# Altium PCB PCB_Lampda_2024-07-19.pcbdoc (part 1 of 2)
Units mil, origin at the board's own origin, x right, y up, seen from the top; angles counter-clockwise.
Board outline 2732.28 x 2742.31 mil, 2 copper layers (Top Layer, Bottom Layer); 110 components, 107 nets, 461 pads, 275 vias.
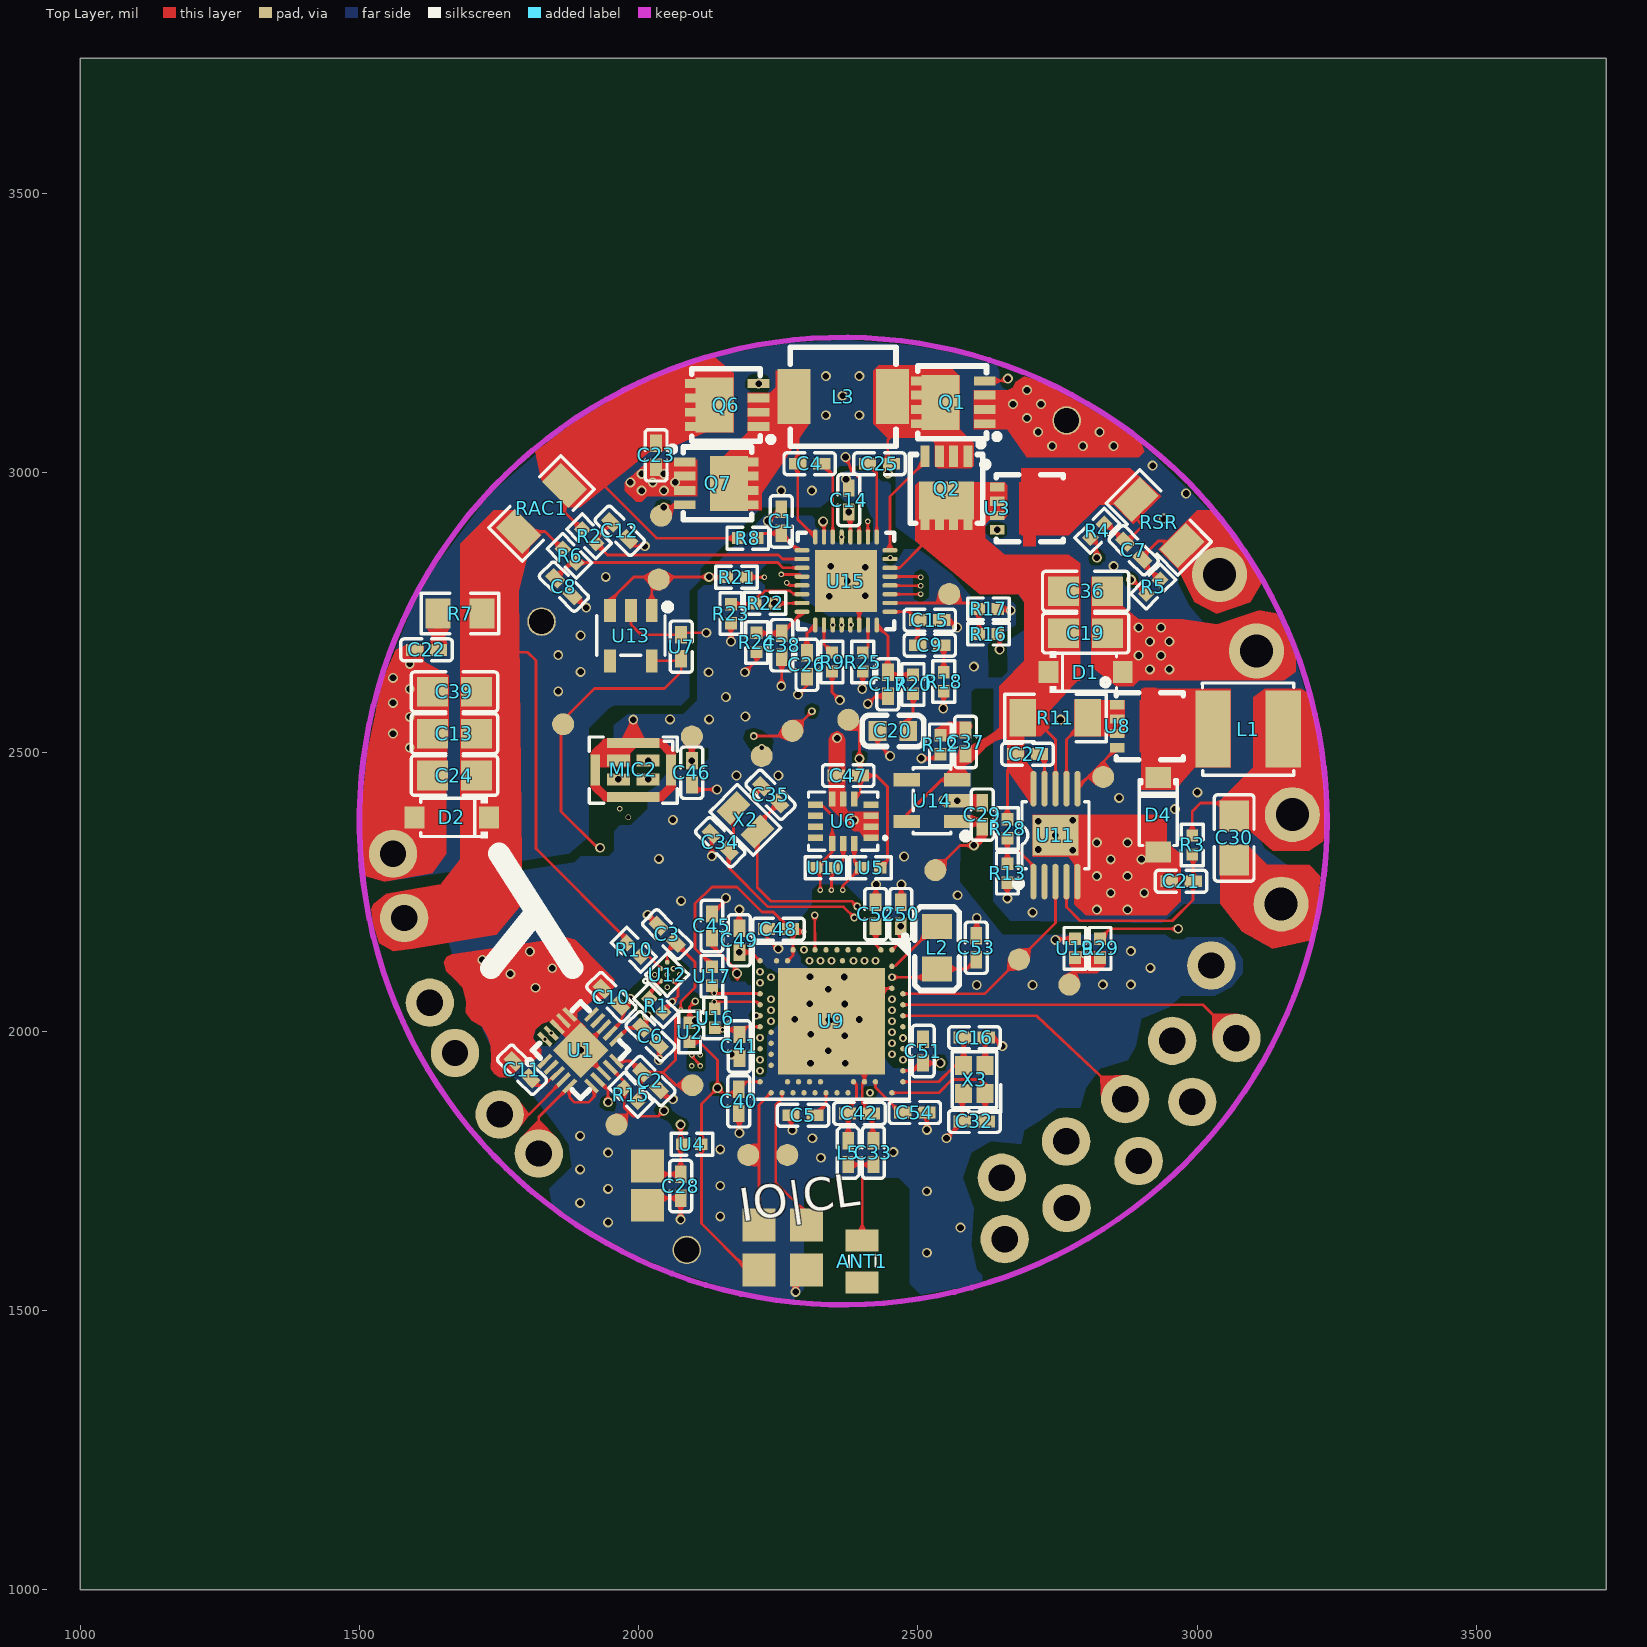
[diagram p0: Top Layer view]
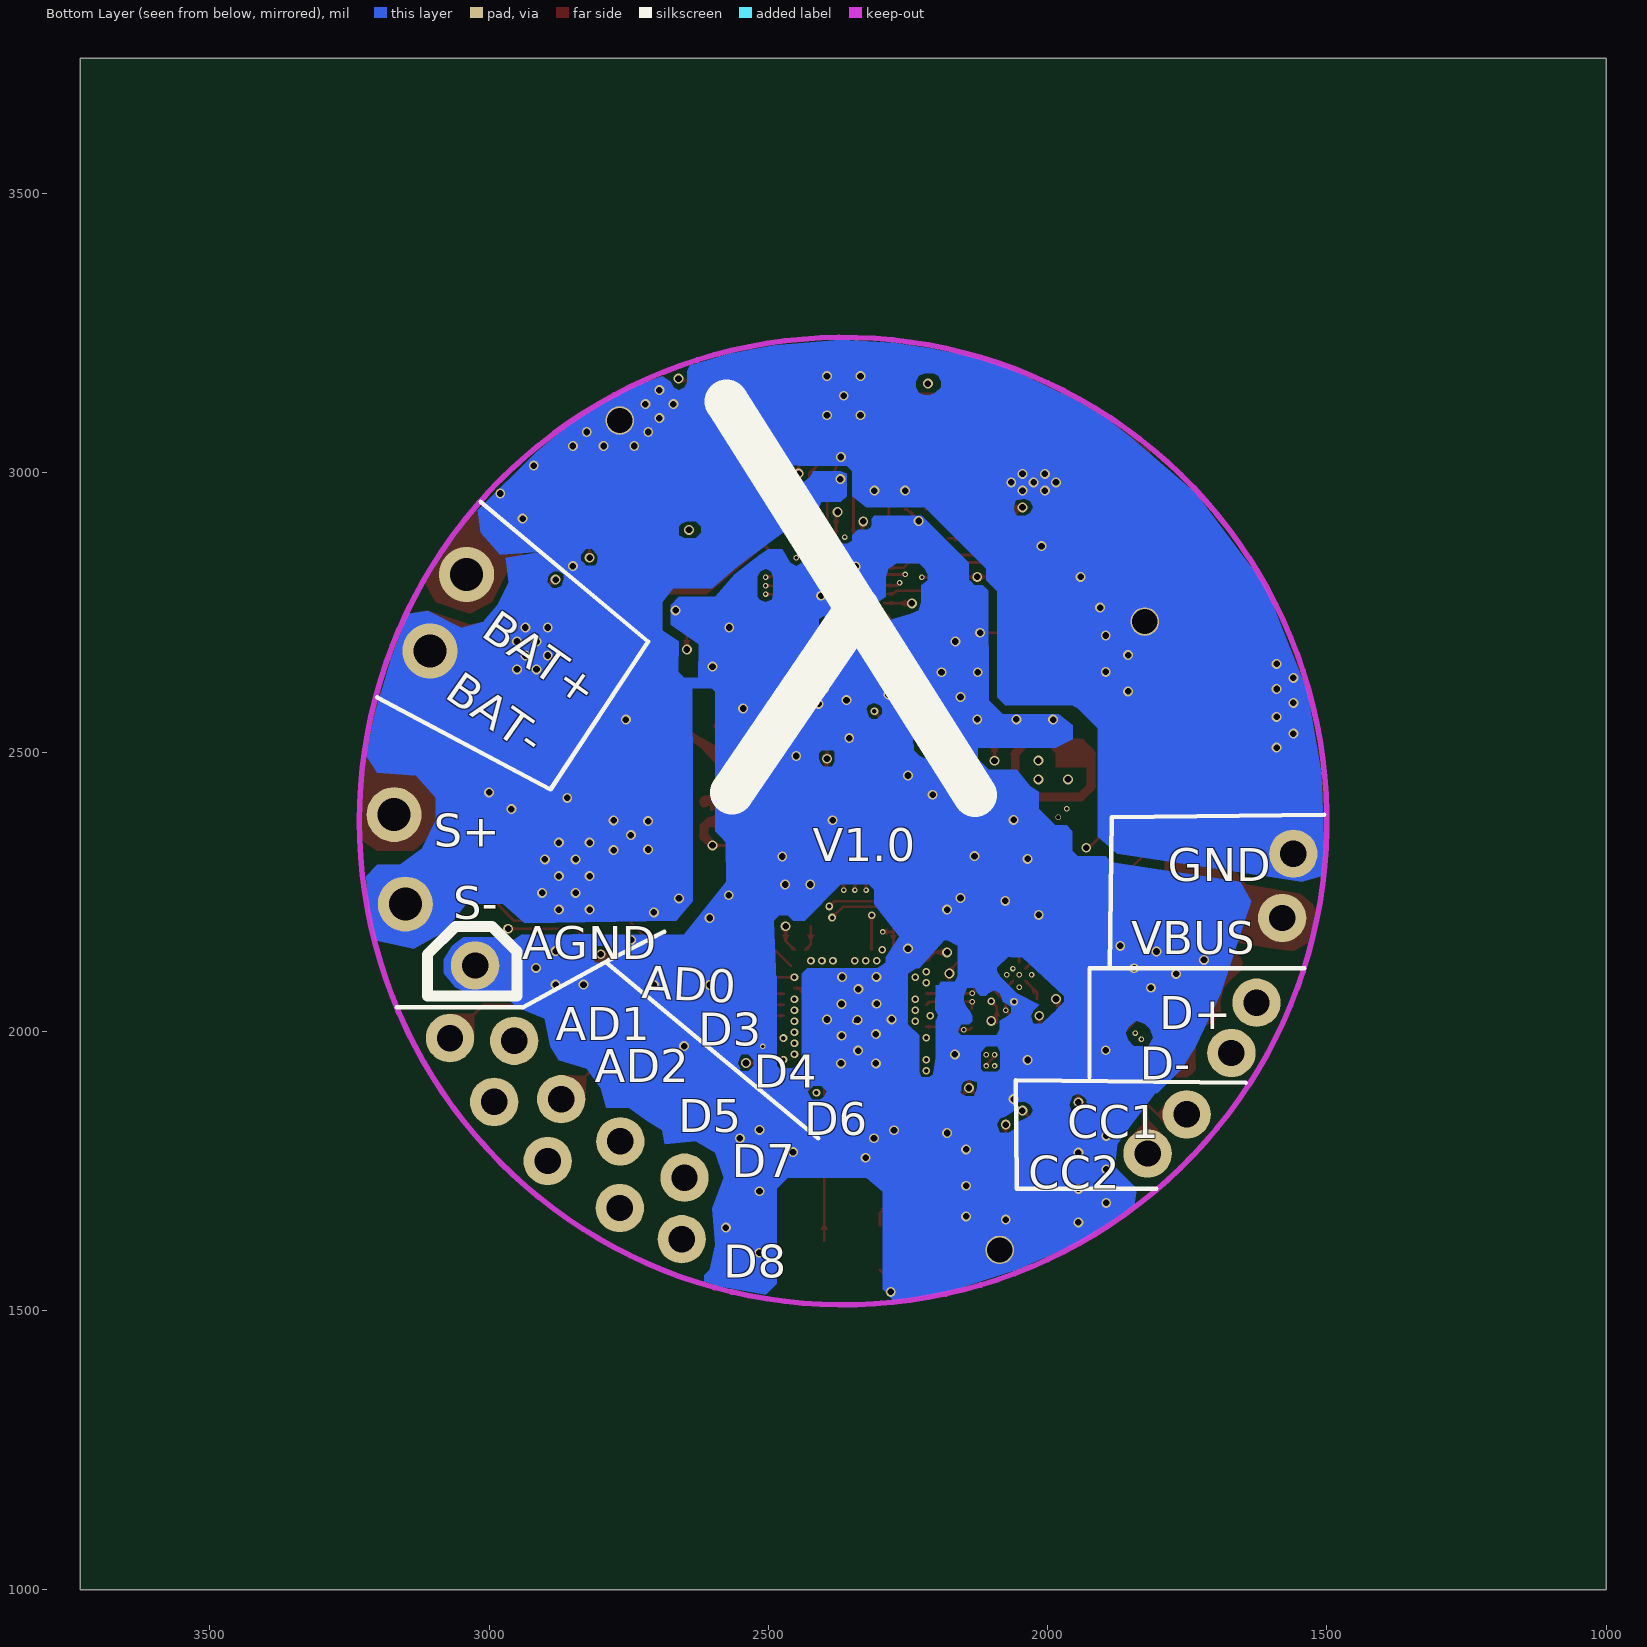
[diagram p1: Bottom Layer view, seen from below]

## Layer stack, top to bottom
Top Layer: signal copper (thickness not stored)
Dielectric: dielectric 12.6, FR-4, Dk 4.8
Bottom Layer: signal copper (thickness not stored)

## Board outline
3732.28,1000 1000,1000 1000,3742.31 3732.28,3742.31

## Components (designator, comment, footprint, x,y, rotation, side; value= is the part's Value field where it differs from the comment)
ANT1 "KH-2012-HM1" ANT-SMD_2P-L2.0-W1.2 2400.19,1587.9 r270 top
C1 "470nF" C0402 2255.19,2912.9 r90 top
C2 "1uF" C0402 2021.14,1911.17 r135 top
C3 "100nF" C0402 2051.07,2173.58 r135 top
C4 "47nF" C0402 2306.14,3016.17 r0 top
C5 "820pF" C0402 2294.24,1849.63 r0 top
C6 "220pF" C0402 2021.14,1991.17 r315 top
C7 "100nF" C0402 2886.14,2861.17 r135 top
C8 "33nF" C0402 1866.14,2796.17 r135 top
C9 "680pF" C0402 2521.14,2691.17 r0 top
C10 "220pF" C0402 1951.14,2061.17 r315 top
C11 "100nF" C0402 1791.14,1931.17 r315 top
C12 "33nF" C0402 1966.14,2896.17 r315 top
C13 "10uF" C0805 1670.19,2532.9 r0 top
C14 "2.2uF" C0402 2376.14,2951.17 r90 top
C15 "15pF" C0402 2521.14,2736.17 r0 top
C16 "12pF" C0402 2601.07,1988.58 r180 top
C17 "33pF" C0402 2446.14,2621.17 r270 top
C19 "10uF" C0805 2800.19,2712.9 r180 top
C20 "1.8uF" C0603 2455.19,2537.9 r180 top
C21 "470pF" C0402 2971.07,2268.58 r180 top
C22 "1uF" C0402 1620.19,2682.9 r0 top
C23 "10nF" C0402 2031.14,3031.17 r270 top
C24 "10uF" C0805 1670.19,2457.9 r0 top
C25 "47nF" C0402 2431.14,3016.17 r180 top
C26 "100pF" C0402 2301.14,2656.17 r270 top
C27 "1uF" C0402 2696.14,2496.17 r180 top
C28 "100nF" C0402 2075.19,1722.9 r270 top
C29 "4.7uF" C0402 2615.19,2387.9 r270 top
C30 "2.2uF" C0805 3066.14,2346.17 r90 top
C32 "12pF" C0402 2601.07,1838.58 r180 top
C33 "0.5pF" C0402 2420.19,1782.9 r90 top
C34 "12pF" C0402 2146.07,2338.58 r315 top
C35 "12pF" C0402 2236.07,2423.58 r315 top
C36 "10uF" C0805 2800.19,2787.9 r180 top
C37 "1uF" C0402 2585.19,2517.9 r270 top
C38 "100pF" C0402 2256.14,2691.17 r270 top
C39 "10uF" C0805 1670.19,2607.9 r0 top
C40 "100nF" C0402 2179.24,1874.63 r270 top
C41 "100nF" C0402 2180.19,1972.9 r90 top
C42 "0.8pF" C0402 2395.19,1852.9 r180 top
C45 "4.7uF" C0402 2131.07,2188.58 r270 top
C46 "100nF" C0402 2095.19,2462.9 r270 top
C47 "100nF" C0402 2375.19,2457.9 r180 top
C48 "4.7uF" C0402 2250.19,2182.9 r180 top
C49 "4.7uF" C0402 2180.19,2162.9 r270 top
C50 "1uF" C0402 2469.24,2209.63 r270 top
C51 "100nF" C0402 2509.24,1964.63 r90 top
C52 "100nF" C0402 2424.24,2209.63 r90 top
C53 "2.2uF" C0402 2604.24,2149.63 r270 top
C54 "100pF" C0402 2494.24,1854.63 r180 top
D1 "PTVS18VS1UR,115" SOD-123_L2.6-W1.7-LS3.5-RD 2800.19,2642.9 r0 top
D2 "PTVS20VS1UR,115" SOD-123_L2.6-W1.7-LS3.5-RD 1665.19,2382.9 r180 top
D4 "DSS34" SOD-123_L2.8-W1.8-LS3.7-RD 2930.19,2387.9 r270 top
L1 "8.2uH" IND-SMD_L4.0-W4.0 3091.14,2541.17 r0 top
L2 "10uH" L0805 2534.24,2149.63 r90 top
L3 "2.2uH" IND-SMD_L4.8-W4.5 2366.14,3136.17 r0 top
L5 "4.7nH" L0402 2375.19,1782.9 r270 top
MIC2 "GMA4030H11-F26" MIC-SMD_8P-L3.0-W4.0-P0.85-BL 1990.19,2467.9 r0 top
Q1 "SIS412DN-T1-GE3" POWERPAK-1212-8_L3.0-W3.0-P0.65-LS3.3-BL 2561.14,3126.17 r90 top
Q2 "SIS412DN-T1-GE3" POWERPAK-1212-8_L3.0-W3.0-P0.65-LS3.3-BL 2551.14,2971.17 r180 top
Q6 "SIS412DN-T1-GE3" POWERPAK-1212-8_L3.0-W3.0-P0.65-LS3.3-BL 2156.14,3121.17 r90 top
Q7 "SIS412DN-T1-GE3" POWERPAK-1212-8_L3.0-W3.0-P0.65-LS3.3-BL 2141.14,2981.17 r270 top
R1 "1kΩ" R0402 2031.14,2046.17 r315 top
R2 "4.99Ω" R0402 1911.14,2886.17 r135 top
R3 "5.1kΩ" R0402 2991.07,2333.58 r270 top
R4 "10Ω" R0402 2821.14,2896.17 r45 top
R5 "10Ω" R0402 2921.14,2796.17 r45 top
R6 "4.99Ω" R0402 1876.14,2851.17 r135 top
R7 "2.2Ω" R0805 1680.19,2747.9 r180 top
R8 "1Ω" R0402 2195.19,2882.9 r0 top
R9 "30kΩ" R0402 2346.14,2661.17 r270 top
R10 "4.7kΩ" R0402 1991.14,2146.17 r315 top
R11 "100mΩ" R1206 2746.14,2561.17 r0 top
R12 "1Ω" R0402 2540.19,2512.9 r90 top
R13 "4.7kΩ" R0402 2660.19,2282.9 r90 top
R15 "100kΩ" R0402 1986.14,1886.17 r315 top
R16 "24kΩ" R0402 2626.14,2711.17 r180 top
R17 "100kΩ" R0402 2626.14,2756.17 r0 top
R18 "10kΩ" R0402 2546.14,2626.17 r270 top
R20 "40.2kΩ" R0402 2491.14,2621.17 r270 top
R21 "10Ω" R0402 2175.19,2812.9 r180 top
R22 "383kΩ" R0402 2226.14,2766.17 r180 top
R23 "221kΩ" R0402 2165.19,2747.9 r270 top
R24 "137kΩ" R0402 2211.14,2696.17 r270 top
R25 "10kΩ" R0402 2401.14,2661.17 r270 top
R28 "40.2kΩ" R0402 2660.19,2362.9 r270 top
R29 "221kΩ" R0402 2826.07,2148.58 r270 top
RAC1 "10mΩ" R1206 1826.14,2936.17 r45 top
RSR "10mΩ" R1206 2931.14,2911.17 r315 top
U1 "TPD8S300" WQFN-20_L3.0-W3.0-P0.40-TL-EP 1896.14,1966.17 r45 top
U2 "10kΩ" R0402 2091.07,1998.58 r270 top
U3 "AGM60P85AP" WDFN-5_L3.3-W3.3-P0.65-BL 2671.14,2936.17 r270 top
U4 "10kΩ" R0402 2095.19,1797.9 r0 top
U5 "10kΩ" R0402 2415.19,2292.9 r180 top
U6 "LSM6DS3TR" LGA-14_L3.0-W2.5-P0.50-TL 2366.14,2376.17 r180 top
U7 "1uF" C0402 2076.07,2688.58 r270 top
U8 "AGM60P85AP" WDFN-5_L3.3-W3.3-P0.65-BL 2886.14,2546.17 r270 top
U9 "NRF52840-QIAA-R" AQFN-73_L7.0-W7.0-P0.50-BL-EP4.8 2345.19,2017.9 r180 top
U10 "10kΩ" R0402 2335.19,2292.9 r180 top
U11 "LM3409HV" MSOP-10_L3.0-W3.0-P0.50-LS5.0-BL-EP 2746.14,2351.17 r0 top
U12 "FUSB302BUCX" WLCSP-9_L1.3-W1.2-R3-C3-P0.40-TL 2051.11,2101.2 r45 top
U13 "AP2204K-5.0TRG1(MS)" SOT-23-5_L3.0-W1.5-P0.95-LS2.8-BL 1986.07,2708.58 r180 top
U14 "ST730M33R" SOT-23-5_L3.0-W1.6-P0.95-LS2.8-BR 2525.19,2412.9 r0 top
U15 "BQ25703ARSNR" VQFN-32_L4.0-W4.0-P0.40-TL-EP 2371.14,2806.17 r0 top
U16 "10kΩ" R0402 2136.07,2023.58 r270 top
U17 "10kΩ" R0402 2131.07,2098.58 r270 top
U19 "47kΩ" R0402 2781.07,2148.58 r270 top
X2 "32.768kHz" CRYSTAL-SMD_L2.0-W1.2 2191.07,2378.58 r315 top
X3 "32MHz" CRYSTAL-SMD_4P-L2.0-W1.6-BL-A 2601.07,1913.58 r90 top

## Footprints (in the part's own frame and the unit in brackets; to place one, negate y for a bottom-side part, rotate by r counter-clockwise, add the part's x,y. Pads: shape width x height; smd on the part's side, far side on the other; paste and mask are expansions set on the pad)
ANT-SMD_2P-L2.0-W1.2 [mm]
  rect 1x1.5 smd paste+0 mask+0.051: 1(-0.95,0) 2(0.95,0)
  silkscreen extent -0.31,-0.6 0.27,0.61
AQFN-73_L7.0-W7.0-P0.50-BL-EP4.8 [mm]
  rect 4.85x4.85 smd paste-100 mask+0.051: 0(0,0)
  round 0.25 smd paste-100 mask+0.051: A8(-3.25,-1.25) A10(-3.25,-0.75) A12(-3.25,-0.25) A14(-3.25,0.25) A16(-3.25,0.75) A18(-3.25,1.25) A20(-3.25,1.75) A22(-3.25,2.25) A23(-3.25,2.75) AA24(2.25,3.25) AB2(2.5,-2.75) AC5(2.75,-2) AC9(2.75,-1) AC11(2.75,-0.5) AC13(2.75,0) AC15(2.75,0.5) AC17(2.75,1) AC19(2.75,1.5) AC21(2.75,2) AC24(2.75,3.25) AD2(3.25,-2.75) AD4(3.25,-2.25) AD6(3.25,-1.75) AD8(3.25,-1.25) AD10(3.25,-0.75) AD12(3.25,-0.25) AD14(3.25,0.25) AD16(3.25,0.75) AD18(3.25,1.25) AD20(3.25,1.75) AD22(3.25,2.25) AD23(3.25,2.75) B1(-2.75,-3.25) B3(-2.75,-2.5) B5(-2.75,-2) B7(-2.75,-1.5) B9(-2.75,-1) B11(-2.75,-0.5) B13(-2.75,0) B15(-2.75,0.5) B17(-2.75,1) B19(-2.75,1.5) B24(-2.75,3.25) C1(-2.25,-3.25) D2(-2,-2.75) D23(-2,2.75) E24(-1.75,3.25) F2(-1.5,-2.75) F23(-1.5,2.75) G1(-1.25,-3.25) H2(-1,-2.75) H23(-1,2.75) J1(-0.75,-3.25) J24(-0.75,3.25) K2(-0.5,-2.75) L1(-0.25,-3.25) L24(-0.25,3.25) M2(0,-2.75) N1(0.25,-3.25) N24(0.25,3.25) P2(0.5,-2.75) P23(0.5,2.75) R1(0.75,-3.25) R24(0.75,3.25) T2(1,-2.75) T23(1,2.75) U1(1.25,-3.25) U24(1.25,3.25) V23(1.5,2.75) W1(1.75,-3.25) W24(1.75,3.25) Y2(2,-2.75) Y23(2,2.75)
  silkscreen extent -3.55,-3.95 3.55,3.55
C0402 [mm]
  rect 0.79x0.54 smd paste-100 mask+0.051: 1(-0.545,0) 2(0.545,0)
  silkscreen extent -1.17,-0.5 1.17,0.5
C0603 [mm]
  rect 0.8x0.9 smd paste+0 mask+0.051: 1(-0.7,0) 2(0.7,0)
  silkscreen extent -1.41,-0.71 1.39,0.72
C0805 [mm]
  rect 1.41x1.35 smd paste-100 mask+0.051: 1(-1,0) 2(1,0)
  silkscreen extent -1.96,-0.9 1.96,0.9
CRYSTAL-SMD_4P-L2.0-W1.6-BL-A [mm]
  rect 0.875x0.775 smd paste+0 mask+0.051: 1(-0.638,-0.488) 2(0.638,-0.488) 3(0.638,0.488) 4(-0.638,0.488)
  silkscreen extent -1.49,-1.2 1.27,1.02
CRYSTAL-SMD_L2.0-W1.2 [mm]
  rect 0.9x1.3 smd paste+0 mask+0.051: 1(-0.762,0) 2(0.762,0)
  silkscreen extent -1.4,-0.89 1.4,0.88
IND-SMD_L4.0-W4.0 [mm]
  rect 1.6x3.5 smd paste+0 mask+0.051: 1(-1.6,0) 2(1.6,0)
  silkscreen extent -2.08,-2.1 2.08,2.1
IND-SMD_L4.8-W4.5 [mm]
  rect 1.5x2.5 smd paste+0 mask+0.051: 1(-2.246,0) 2(2.246,0)
  silkscreen extent -2.4,-2.25 2.4,2.25
L0402 [mm]
  rect 0.79x0.54 smd paste-100 mask+0.051: 1(-0.545,0) 2(0.545,0)
  silkscreen extent -1.17,-0.5 1.17,0.5
L0805 [mil]
  rect 44.59x54.21 smd paste-3937.01 mask+2: 1(-38.05,0) 2(38.04,0)
  silkscreen extent -77,-40 73,40
LGA-14_L3.0-W2.5-P0.50-TL [mm]
  rect 0.675x0.28 smd paste+0 mask+0.051: 1(-1.262,0.75) 2(-1.262,0.25) 3(-1.262,-0.25) 4(-1.262,-0.75) 8(1.262,-0.75) 9(1.262,-0.25) 10(1.262,0.25) 11(1.262,0.75)
  rect 0.28x0.675 smd paste+0 mask+0.051: 5(-0.5,-1.012) 6(0,-1.012) 7(0.5,-1.012) 12(0.5,1.012) 13(0,1.012) 14(-0.5,1.012)
  silkscreen extent -1.98,-1.33 1.58,1.33
MIC-SMD_8P-L3.0-W4.0-P0.85-BL [mm]
  rect 1.05x0.55 smd paste+0 mask+0.051: 1(0.675,0.425) 2(-0.675,0.425) 3(-0.675,-0.425) 4(0.675,-0.425)
  rect 0.45x1.4 smd paste+0 mask+0.051: 5(1.725,0) 7(-1.725,0)
  rect 2.4x0.45 smd paste+0 mask+0.051: 6(0,1.225) 8(0,-1.225)
  silkscreen extent -2,-1.52 2,1.5
MSOP-10_L3.0-W3.0-P0.50-LS5.0-BL-EP [mm]
  oval 0.28x1.62 smd paste-100 mask+0.051: 1(-1,-2.11) 2(-0.5,-2.11) 3(0,-2.11) 4(0.5,-2.11) 5(1,-2.11) 6(1,2.11) 7(0.5,2.11) 8(0,2.11) 9(-0.5,2.11) 10(-1,2.11)
  rect 2.1x1.83 smd paste-100 mask+0.051: 11(0,0)
  silkscreen extent -1.84,-2.35 1.52,1.52
POWERPAK-1212-8_L3.0-W3.0-P0.65-LS3.3-BL [mil]
  rect 15.98x39.02 smd paste-3937.01 mask+1.97: 1(-38.39,-58.5) 2(-12.8,-58.5) 3(12.8,-58.5) 4(38.39,-58.5)
  rect 15.98x30 smd paste-3937.01 mask+1.97: 5(38.39,58.5) 6(12.8,58.5) 7(-12.8,58.5) 8(-38.39,58.5)
  rect 98.42x67.99 smd paste-3937.01 mask+1.97: 8(0,20.5)
  silkscreen extent -66,-85 65,61
R0402 [mm]
  rect 0.566x0.54 smd paste-100 mask+0.051: 1(-0.433,0) 2(0.433,0)
  silkscreen extent -0.94,-0.5 0.94,0.5
R0805 [mil]
  rect 44.59x54.21 smd paste-3937.01 mask+2: 1(-39.37,0) 2(39.37,0)
  silkscreen extent -69,-36 69,36
R1206 [mil]
  rect 47.54x66.97 smd paste-3937.01 mask+2: 1(-58.22,0) 2(58.22,0)
  silkscreen extent -91,-42 91,42
SOD-123_L2.6-W1.7-LS3.5-RD [mm]
  rect 0.9x1 smd paste+0 mask+0.051: 1(-1.693,0) 2(1.693,0)
  silkscreen extent -1.63,-0.94 1.41,0.94
SOD-123_L2.8-W1.8-LS3.7-RD [mm]
  rect 0.95x1.15 smd paste+0 mask+0.051: 1(-1.693,0) 2(1.693,0)
  silkscreen extent -1.58,-0.87 1.41,0.87
SOT-23-5_L3.0-W1.5-P0.95-LS2.8-BL [mm]
  rect 0.532x1.045 smd paste+0 mask+0.051: 1(-0.95,-1.147) 2(0,-1.147) 3(0.95,-1.147) 4(0.95,1.147) 5(-0.95,1.147)
  silkscreen extent -1.82,-1.45 1.55,0.9
SOT-23-5_L3.0-W1.6-P0.95-LS2.8-BR [mm]
  rect 1.2x0.6 smd paste+0 mask+0.05: 1(1.15,-0.95) 2(1.15,0) 3(1.15,0.95) 4(-1.15,0.95) 5(-1.15,-0.95)
  silkscreen extent -0.85,-1.76 1.68,1.5
VQFN-32_L4.0-W4.0-P0.40-TL-EP [mm]
  oval 0.7x0.2 smd paste-100 mask+0.051: 1(-2,1.4) 2(-2,1) 3(-2,0.6) 4(-2,0.2) 5(-2,-0.2) 6(-2,-0.6) 7(-2,-1) 8(-2,-1.4) 17(2,-1.4) 18(2,-1) 19(2,-0.6) 20(2,-0.2) 21(2,0.2) 22(2,0.6) 23(2,1) 24(2,1.4)
  oval 0.2x0.7 smd paste-100 mask+0.051: 9(-1.4,-2) 10(-1,-2) 11(-0.6,-2) 12(-0.2,-2) 13(0.2,-2) 14(0.6,-2) 15(1,-2) 16(1.4,-2) 25(1.4,2) 26(1,2) 27(0.6,2) 28(0.2,2) 29(-0.2,2) 30(-0.6,2) 31(-1,2) 32(-1.4,2)
  rect 2.8x2.8 smd paste-100 mask+0.051: 33(0,0)
  silkscreen extent -2.51,-2.2 2.2,2.2
WDFN-5_L3.3-W3.3-P0.65-BL [mm]
  rect 0.42x0.66 smd paste-100 mask+0.051: 1(-0.975,-0.735) 2(-0.325,-0.735) 3(0.325,-0.735) 4(0.975,-0.735)
  Top Layer region: 1.185,0.45 1.185,0.27 -1.185,0.27 -1.185,0.45 -1.75,0.45 -1.75,1.02 -1.185,1.02 -1.185,2.535 -0.765,2.535 -0.765,2.065 -0.535,2.065 -0.535,2.535 -0.115,2.535 -0.115,2.065 0.115,2.065 0.115,2.535 0.535,2.535 0.535,2.065 0.765,2.065 0.765,2.535 1.185,2.535 1.185,1.02 1.73,1.02 1.73,0.45
  silkscreen extent -2.15,-1.43 1.52,2.26
WLCSP-9_L1.3-W1.2-R3-C3-P0.40-TL [mm]
  round 0.215 smd paste-100 mask+0.051: A1(-0.4,0.4) A2(0,0.4) A3(0.4,0.4) B1(-0.4,0) B2(0,0) B3(0.4,0) C1(-0.4,-0.4) C2(0,-0.4) C3(0.4,-0.4)
  silkscreen extent -1,-0.7 0.7,0.7
WQFN-20_L3.0-W3.0-P0.40-TL-EP [mm]
  rect 0.8x0.2 smd paste+0 mask+0.051: 1(-1.5,0.8) 2(-1.5,0.4) 3(-1.5,0) 4(-1.5,-0.4) 5(-1.5,-0.8) 11(1.5,-0.8) 12(1.5,-0.4) 13(1.5,0) 14(1.5,0.4) 15(1.5,0.8)
  rect 0.2x0.8 smd paste+0 mask+0.051: 6(-0.8,-1.5) 7(-0.4,-1.5) 8(0,-1.5) 9(0.4,-1.5) 10(0.8,-1.5) 16(0.8,1.5) 17(0.4,1.5) 18(0,1.5) 19(-0.4,1.5) 20(-0.8,1.5)
  rect 1.8x1.8 smd paste+0 mask+0.051: 21(0,0)
  silkscreen extent -2.13,-1.55 1.55,1.55

## Free pads (board coordinates)
  round 39.37 smd paste-3937.01 mask+2: 1(1864.76,2549.82) 1(1960.19,1832.9) 1(2035.74,2808.91) 1(2040.19,2922.9) 1(2095.19,2527.9) 1(2096.08,1903.58) 1(2196.07,1778.58) 1(2220.19,2492.9) 1(2266.07,1778.58) 1(2275.19,2537.9) 1(2375.19,2557.9) 1(2531.07,2288.58) 1(2555.96,2782.9) 1(2680.82,2128.53) 1(2771.07,2083.58) 1(2831.67,2455.38)
  rect 59.05x59.05 smd paste-3937.01 mask+2: 1(2016.07,1688.58) 1(2016.07,1758.58) 1(2215.19,1572.9) 1(2215.19,1652.9) 1(2300.19,1572.9) 1(2300.19,1652.9)
  round 51.18 hole 45.35 paste-3937.01 mask+2: 2(1826.08,2733.58) 2(2086.07,1608.58) 2(2766.07,3093.58)
  round 86.61 hole 47.24 paste+0 mask+2: ""(1560.19,2317.9) ""(1580.19,2202.9) ""(1626.14,2051.17) ""(1671.14,1961.17) ""(1751.14,1851.17) ""(1821.14,1781.17) ""(2650.19,1737.9) ""(2655.19,1627.9) ""(2765.19,1802.9) ""(2766.07,1683.58) ""(2871.07,1878.58) ""(2895.19,1767.9) ""(2955.19,1982.9) ""(2991.08,1873.57) ""(3025.19,2117.9) ""(3070.19,1987.9)
  round 98.43 hole 59.06 paste+0 mask+2: ""(3040.19,2817.9) ""(3106.14,2681.17) ""(3150.19,2227.9) ""(3170.19,2387.9)

## Via types
v1: diameter 17.72, hole 11.81, Top Layer to Bottom Layer, tented both sides, 203 vias
v2: diameter 13.78, hole 7.87, Top Layer to Bottom Layer, tented both sides, 35 vias
v3: diameter 9.84, hole 5.91, Top Layer to Bottom Layer, tented both sides, 34 vias
v4: diameter 98.43, hole 59.06, Top Layer to Bottom Layer, tented both sides, 2 vias
v5: diameter 9.84, hole 7.87, Top Layer to Bottom Layer, tented both sides, 1 vias

## Nets (pads, with @x,y where several pads share a name; then routed paths per layer and width w, separated by ;. In a path a pad name is that pad's centre, name@x,y a point inside that pad or via, vN(x,y) a via of type N, cw(c..) or ccw(c..) an arc to the next point about the centre after c; other vN are vias at no path point)
AIN0: pad.@2871.07,1878.58 U9.A12 | length 456.9
  Top Layer w5: U9.A12@2473.14,2027.77 2711.94,2027.77 pad.@2871.04,1878.57
AIN1: pad.@2991.08,1873.57 U9.B13 | length 597.4
  Mid-Layer 1 w5: v2@2453.44,2017.87 2826.78,2017.87 2948.97,1895.69 2968.97,1895.69 pad.@2991.08,1873.57
  other v2: 2453.46,2017.9
AIN4: pad.@2955.19,1982.9 U9.B11 | length 524.4
  Mid-Layer 1 w5: v2(2453.46,2037.58) 2900.51,2037.58 pad.@2955.19,1982.9
AIN5: pad.@3070.19,1987.9 U9.A10 | length 621.7
  Top Layer w5: U9.A10@2473.14,2047.43 3010.66,2047.43 pad.@3070.19,1987.9
ANT: C42.2 L5.1 U9.H23 | length 115
  Top Layer w5: L5.1@2375.19,1804.36 2375.19,1851.44 C42.2@2373.73,1852.9 2373.73,1861.44 2390.19,1877.9 2390.19,1904 U9.H23@2384.56,1909.63
BAT21: pad.1@2771.07,2083.58 R29.2 U9.B9 U19.2 | length 527.5
  Top Layer w5: pad.1@2771.07,2083.58 2781.07,2093.58 U19.2@2781.07,2131.54 ; U19.2@2781.07,2131.54 R29.2@2826.07,2131.54 2806.55,2131.54 v1(2800.19,2137.9) 2793.83,2131.54 U19.2@2781.07,2131.54
  Mid-Layer 1 w5: v2(2453.46,2057.27) 2719.56,2057.27 v1(2800.19,2137.9)
BAT+: C7.1 pad.@3040.19,2817.9 R5.2 R29.1 RSR.2 | length 935.9
  Top Layer w5: R29.1@2826.04,2165.67 2844.04,2183.57 v1(2966.07,2183.58) ; C7.1@2901.31,2846 2901.31,2840.1 R5.2@2933.19,2808.22 ; C7.1@2901.31,2846 2901.34,2848.97 2930.24,2877.87 2940.94,2877.87 RSR.2@2951.64,2867.17
  Mid-Layer 2 w5: v1(2966.07,2183.58) 3035.39,2252.9 3040.19,2252.9 v4(3040.19,2817.9)
C9_2: C9.2 R18.1 | length 49.4
  Top Layer w5: C9.2@2542.6,2691.17 2546.14,2687.63 R18.1@2546.14,2643.21
C22_2: C22.2 R7.2 | length 65
  Top Layer w15.75: R7.2@1640.82,2747.9 C22.2@1641.65,2682.9
CH_ACN: C12.1 R2.1 U15.2 | length 429.8
  Top Layer w5: C12.1@1950.97,2911.35 1923.19,2883.56 R2.1@1923.19,2874.12 1944.41,2852.9 2250.19,2852.9 2257.55,2845.54 U15.2@2292.4,2845.54
CH_ACP: C8.2 R6.1 U15.3 | length 456.8
  Top Layer w5: C8.2@1850.97,2811.35 1878.75,2839.12 R6.1@1888.19,2839.12 2248.97,2839.12 2258.3,2829.79 U15.3@2292.4,2829.79
CH_BATDRV: U3.4 U15.21 | length 228
  Top Layer w5: U15.21@2449.88,2814.05 2504.05,2814.04 v3(2505.19,2812.9)
  Mid-Layer 2 w5: v3(2505.19,2812.9) 2557.31,2812.9 v1(2642.2,2897.79)
CH_BATPREZ: pad.1@2555.96,2782.9 R16.2 R17.1 U15.18 | length 208.6
  Top Layer w5: U15.18@2449.88,2766.8 2598.47,2766.8 R17.1@2609.1,2756.17 R16.2@2609.1,2711.17
CH_BTST1: C4.2 U15.30 | length 139.5
  Top Layer w5: C4.2@2327.6,3016.17 2347.52,2996.25 U15.30@2347.52,2884.91
CH_BTST2: C25.2 U15.25 | length 138.1
  Top Layer w5: C25.2@2409.68,3016.17 2426.26,2999.59 U15.25@2426.26,2884.91
CH_CHARGE_OK: U9.U1 U15.4 | length 760.8
  Top Layer w5: v3(2255.19,2817.9) 2288.54,2817.9 U15.4@2292.4,2814.05
  Mid-Layer 1 w5: v3(2255.19,2817.9) 2215.24,2777.87 2215.24,2557.87 2270.24,2502.87 2270.24,2171.67 v2@2295.94,2145.87
  other v2: 2295.98,2145.85
CH_CMPOUT: R25.1 U15.15 | length 53.1
  Top Layer w5: R25.1@2401.14,2678.21 2410.51,2687.58 U15.15@2410.51,2727.43
CH_COMP1: C17.1 R20.1 U15.16 | length 139.9
  Top Layer w5: U15.16@2426.26,2727.43 2446.14,2707.55 C17.1@2446.14,2642.63 2450.56,2638.21 R20.1@2491.14,2638.21
CH_COMP2: C9.1 C15.1 U15.17 | length 101
  Top Layer w5: U15.17@2449.88,2751.05 2484.8,2751.05 C15.1@2499.68,2736.17 C9.1@2499.68,2691.17
CH_EN_OTG: U9.T2 U15.5 | length 771.4
  Top Layer w5: v3(2265.19,2802.9) 2269.79,2798.3 U15.5@2292.4,2798.3
  Mid-Layer 1 w5: v3(2265.19,2802.9) 2255.34,2802.87 2225.24,2772.77 2225.24,2562.87 2280.24,2507.87 2280.24,2214.37 2310.24,2184.37 v2@2310.24,2130.57 ; v2@2310.24,2130.57 v2(2305.84,2126.17) v2@2310.24,2130.57
CH_HIDRV1: Q6.4 U15.31 | length 323.2
  Top Layer w5: v1(2330.19,2912.9) 2331.77,2911.32 U15.31@2331.77,2884.91
  Mid-Layer 2 w5: v1(2214.64,3159.56) 2330.19,3044.01 v1(2330.19,2912.9)
CH_HIDRV2: Q2.4 U15.24 | length 194.4
  Top Layer w5: U15.24@2449.88,2861.29 2449.88,2957.59 2512.75,3020.46 Q2.4@2512.75,3029.67
CH_IADPT: C38.1 R24.1 U15.8 | length 98.4
  Top Layer w5: R24.1@2211.14,2713.21 2256.14,2712.67 2292.4,2748.89 U15.8@2292.4,2751.05
CH_IBAT: C26.1 U15.9 | length 56
  Top Layer w5: C26.1@2301.14,2677.63 2301.14,2712.55 U15.9@2316.02,2727.43
CH_ILIMHIZ: R22.2 R23.1 U15.6 | length 142.4
  Top Layer w5: R23.1@2165.19,2764.94 2207.87,2764.94 R22.2@2209.1,2766.17 ; R22.2@2209.1,2766.17 2209.14,2771.77 2225.84,2788.57 2271.07,2788.58 2276.07,2783.58 U15.6@2292.4,2782.55
CH_INT_N: U2.1 U9.AD12 U12.B2 | length 224.7
  Top Layer w5: U2.1@2091.07,2015.62 2091.07,2043.58 v2(2101.07,2053.58)
  Mid-Layer 1 w5: v3(2051.14,2101.17) 2098.73,2053.58 v2(2101.07,2053.58)
  Mid-Layer 2 w5: v1(2101.07,2018.58) 2110.39,2027.9 v2(2210.19,2027.9)
CH_LODRV1: pad.1@2040.19,2922.9 Q7.4 U15.29 | length 381.1
  Top Layer w5: pad.1@2044.94,2937.07 Q7.4@2082.64,2943.17
  Mid-Layer 2 w5: v1(2045.19,2937.9) 2045.19,2932.9 2093.18,2884.91 v3(2363.27,2884.91)
CH_LODRV2: Q1.4 U15.26 | length 442.4
  Top Layer w5: v3(2410.19,2912.9) U15.26@2410.51,2884.91 ; Q1.4@2619.64,3164.56 2657.05,3164.56 v1(2661.07,3168.58)
  Mid-Layer 2 w5: v3(2410.19,2912.9) 2410.24,2937.67 2641.04,3168.57 v1@2661.04,3168.57
CH_PROC_HOT: U9.R1 U15.11 | length 668.7
  Top Layer w5: v2(2315.19,2207.9) U9.R1@2315.64,2145.87
  Mid-Layer 1 w5: v2(2315.19,2207.9) 2290.24,2232.87 2290.24,2512.87 2235.19,2567.92 2235.19,2627.9 2334.72,2727.43 v3(2347.52,2727.43)
CH_PSYS: R9.1 U15.10 | length 55.2
  Top Layer w5: U15.10@2331.77,2727.43 2331.77,2692.58 R9.1@2346.14,2678.21
CH_REGN: C14.1 pad.1@2035.74,2808.91 R21.2 U13.1 U13.3 U15.28 | length 665.9
  Top Layer w5: U13.3@1948.67,2753.76 1948.67,2771.18 1991.07,2813.58 2031.07,2813.58 2037.91,2806.74 pad.1@2039.24,2806.74 ; U13.1@2023.48,2753.76 2023.47,2790.98 2046.08,2813.58 v1(2126.07,2813.58) 2126.76,2812.89 2138.35,2812.89 R21.2@2158.14,2812.87 ; v1(2376.14,2929.71) 2379.02,2926.83 U15.28@2379.02,2884.91
  Mid-Layer 1 w5: v1(2126.07,2813.58) 2126.07,2833.78 2222,2929.71 v1(2376.14,2929.71)
CH_SRN: R5.1 U15.19 | length 480.1
  Top Layer w5: U15.19@2449.84,2782.57 v3(2505.19,2782.9) ; v1(2881.07,2808.58) 2884.63,2808.58 R5.1@2909.09,2784.12
  Mid-Layer 2 w5: v3(2505.19,2782.9) 2855.39,2782.9 v1(2881.07,2808.58)
CH_SRP: R4.1 U15.20 | length 431.9
  Top Layer w5: U15.20@2449.84,2798.27 v3(2505.19,2797.9) ; R4.1@2809.09,2884.12 2820.19,2873.02 v1(2820.19,2847.9)
  Mid-Layer 2 w5: v3(2505.19,2797.9) 2770.19,2797.9 v1(2820.19,2847.9)
CH_SW1: C4.1 L3.1 Q6.1 Q6.2 Q6.3 Q7.5 Q7.6 Q7.7 Q7.8 U15.32 | length 205.9
  Top Layer w5: C4.1@2284.64,3016.17 2285.24,3077.87 ; C4.1@2284.68,3016.17 2284.68,2916.25 U15.32@2316.02,2884.91
CH_SW2: C25.1 L3.2 Q1.5 Q1.6 Q1.7 Q1.8 Q2.1 Q2.2 Q2.3 U15.23 | length 230.1
  Top Layer w5: v1(2446.07,2998.58) 2446.07,3058.78 2455.19,3067.9
  Mid-Layer 1 w5: v1@2446.04,2998.57 2441.07,2988.58 2441.07,2853.58 v3(2450.19,2847.9)
CH_VBUS: C1.1 R8.2 U15.1 | length 96.2
  Top Layer w5: R8.2@2212.23,2882.9 2220.77,2891.44 C1.1@2255.19,2891.44 2285.34,2861.29 U15.1@2292.4,2861.29
CH_VDDA: R16.1 R21.1 R22.1 U15.7 | length 602.4
  Top Layer w5: R21.1@2192.23,2812.9 v3(2225.19,2812.9) ; v1(2243.14,2766.17) U15.7@2292.4,2766.8 ; R16.1@2643.18,2711.17 2646.07,2708.28 v1(2646.07,2683.58)
  Mid-Layer 2 w5: v3(2225.19,2812.9) 2243.14,2794.95 v1(2243.14,2766.17) 2254.74,2754.57 2261.44,2747.87 2581.78,2747.87 v1(2646.07,2683.58)
COFF: C21.1 R3.2 U11.4 | length 380
  Top Layer w5: U11.4@2765.82,2268.1 2765.84,2222.27 2790.24,2197.87 2955.24,2197.87 2992.53,2235.16 C21.1@2992.53,2268.58 2992.53,2315.08 R3.2@2991.07,2316.54
CSN: R11.2 U8.1 U8.2 U8.3 U11.7 | length 142.9
  Top Layer w5: U11.7@2765.82,2434.24 2765.83,2522.64 R11.2@2804.36,2561.17
D4_1: D4.1 L1.1
DEC6: C53.2 L2.1 U9.B5 U9.E24 | length 386.8
  Top Layer w5: v2(2453.46,2096.64) 2519.29,2096.64 L2.1@2534.24,2111.59 2587.66,2111.59 C53.2@2604.24,2128.17
  Mid-Layer 1 w5: v2(2414.09,1889.95) 2425.19,1901.05 2425.19,2068.37 v2(2453.46,2096.64)
DECUSB: C45.2 U9.AC5 | length 182.6
  Top Layer w5: C45.2@2131.07,2167.12 2131.07,2153.58 2176.07,2108.58 v1(2176.07,2103.58) 2176.65,2103 2176.65,2092.9
  Mid-Layer 2 w5: v1(2176.07,2103.58) 2200.39,2127.9 2215.19,2127.9 2236.92,2106.17 v2(2236.92,2096.64)
FAULT: pad.1@1960.19,1832.9 R15.1 U1.9 U9.AD20 | length 405.8
  Top Layer w5: U1.9@1949.03,1935.54 1974.09,1910.47 R15.1@1974.09,1898.22 1974.09,1864 1990.19,1847.9 2035.27,1847.9 v1(2045.24,1857.87) ; pad.1@1960.19,1832.9 1981.67,1854.38 1983.71,1854.38
  Mid-Layer 1 w5: v1(2045.24,1857.87) 2125.24,1857.87 v2(2217.24,1949)
GND: C1.2 C2.1 C3.2 C5.1 C6.2 C8.1 C10.1 C11.1 C12.2 C13.1 C14.2 C15.2 C16.1 C17.2 C19.1 C20.2 C21.2 C22.1 C23.2 C24.1 C26.2 C28.2 C29.1 C30.1 C32.2 C33.2 C34.1 C35.1 C36.1 C38.2 C39.1 C40.2 C41.1 C42.1 C45.1 C46.2 C47.2 C48.2 C49.1 C50.1 C51.2 C52.2 C53.1 C54.1 D1.2 D2.2 D4.2 MIC2.2 MIC2.5 MIC2.6 MIC2.7 MIC2.8 pad.1@2016.07,1688.58 pad.1@2300.19,1572.9 pad.2 pad.@1560.19,2317.9 pad.@3025.19,2117.9 pad.@3106.14,2681.17 pad.@3150.19,2227.9 Q1.1 Q1.2 Q1.3 Q7.1 Q7.2 Q7.3 R1.2 R9.2 R12.1 R13.1 R17.2 R18.2 R23.2 R24.2 R25.2 U1.8 U1.13 U1.16 U1.17 U1.18 U1.21 U6.1 U6.2 U6.3 U6.6 U6.7 U7.1 U9.0 U9.B7 U9.F23 U11.5 U11.11 U12.C2 U13.2 U14.2 U15.14 U15.27 U15.33 U19.1 X3.2 X3.4 | length 3294.9
  Top Layer w5: 1750.24,1972.87 C11.1@1775.94,1946.37 ; C8.1@1881.31,2781 1883.65,2781 v1(1906.07,2758.58) ; U1.8@1937.89,1924.41 v1(1896.13,1966.17) U1.13@1937.89,2007.93 ; C12.2@1981.31,2881 1993.73,2868.58 v1(2011.07,2868.58) ; U13.2@1986.07,2753.76 1986.07,2728.58 2004.62,2710.04 U7.1@2076.07,2710.04 2079.61,2713.58 v1(2121.07,2713.58) ; pad.1@2016.07,1688.58 2028.93,1701.44 C28.2@2075.19,1701.44 v1(2075.19,1662.9) ; v1(2016.07,2208.58) C3.2@2035.9,2188.75 ; v1(2036.07,1948.58) 2036.31,1948.82 C6.2@2036.31,1976 ; C2.1@2036.31,1896 2053.73,1878.58 v1(2061.07,1878.58) ; R1.2@2043.19,2034.12 2043.19,2035.9 v2(2060.19,2052.9) ; v2(2060.19,2052.9) 2070.19,2062.9 2070.19,2082.12 U12.C2@2062.25,2090.06 ; C46.2@2095.19,2441.44 2103.73,2432.9 v1(2140.19,2432.9) ; C34.1@2130.9,2353.75 2131.07,2353.58 v1(2131.07,2313.58) ; C45.1@2131.07,2210.04 2156.07,2235.04 v1(2156.07,2238.58) ; v1(2165.19,2697.9) R23.2@2165.19,2730.86 ; v1(2166.07,1958.58) 2173.13,1958.58 C41.1@2180.24,1951.47 ; C40.2@2179.24,1853.17 v1@2180.24,1822.87 ; C49.1@2180.19,2184.36 v1(2180.19,2217.9) ; v1(2190.19,2642.9) 2211.14,2663.85 R24.2@2211.14,2679.13 ; v1(2206.07,2423.58) 2200.98,2418.49 2200.64,2418.49 C35.1@2220.9,2438.75 ; C48.2@2228.73,2182.9 2228.73,2169.36 v1(2250.19,2147.9) ; v1(2231.07,2913.58) 2251.85,2934.36 C1.2@2255.19,2934.36 ; v1(2255.19,2617.9) 2256.14,2618.85 C38.2@2256.14,2669.71 ; v1@2270.19,1822.9 2272.78,1825.49 C5.1@2272.78,1849.63 ; v1(2281.07,1533.58) 2281.07,1553.7 pad.1@2300.19,1572.9 ; v1(2285.19,2602.9) 2301.14,2618.85 C26.2@2301.14,2634.71 ; R9.2@2346.14,2644.13 2346.14,2606.95 v1(2360.19,2592.9) ; v1@2370.24,3032.87 2381.07,3003.58 2396.07,2988.58 2394.74,2964.87 U15.27@2394.74,2884.87 ; v1(2371.07,2988.58) 2376.14,2983.51 C14.2@2376.14,2972.67 ; v1(2373.36,2806.17) 2394.76,2784.77 U15.14@2394.76,2727.43 ; v1(2400.19,2612.9) 2401.14,2613.85 R25.2@2401.14,2644.13 ; v1(2410.09,2586.31) 2423.49,2599.71 C17.2@2446.14,2599.71 ; C33.2@2420.19,1804.36 C42.1@2416.65,1852.9 2416.65,1856.44 2400.19,1872.9 2400.19,1905.58 U9.F23@2404.24,1909.63 2404.24,1934.99 2404.24,1938.85 2340.56,2002.53 v1(2340.56,2020.37) 2388.61,2020.37 2445.19,2076.95 U9.B7@2453.46,2076.95 ; C52.2@2424.24,2231.09 2424.24,2261.95 v1(2425.19,2262.9) ; C20.2@2427.64,2537.9 2427.63,2515.46 v1(2450.19,2492.9) ; C50.1@2469.24,2231.09 2470.19,2232.02 v1(2470.19,2262.9) ; v1(2506.07,2488.58) 2532.91,2488.58 R12.1@2540.19,2495.86 ; C54.1@2515.74,1854.67 2516.07,1854.34 v1(2516.07,1823.58) ; C15.2@2542.6,2736.17 2556.92,2736.17 v1(2570.19,2722.9) ; v1(2545.19,2577.9) R18.2@2546.14,2609.17 ; v1(2551.07,1808.58) 2579.61,1837.12 C32.2@2579.61,1838.58 2579.61,1886.2 X3.4@2581.86,1888.47 ; C53.1@2604.24,2171.09 2605.19,2172.02 v1(2605.19,2202.9) ; X3.2@2620.29,1938.69 2620.28,1986.33 C16.1@2622.53,1988.58 2636.07,1988.58 v1(2651.07,1973.58) ; R17.2@2643.18,2756.17 2663.48,2756.17 v1(2666.07,2753.58) ; v1@2660.19,2232.9 v1(2660.19,2237.9) R13.1@2660.19,2265.86 ; v1(2746.07,2163.58) 2748.11,2165.62 U19.1@2781.07,2165.62 ; U11.5@2785.51,2268.1 2785.51,2227.58 2795.19,2217.9
  Top Layer w15.75: v1(1990.19,2557.9) MIC2.6@1990.19,2516.13 ; MIC2.6@1990.19,2516.13 1940.51,2516.13 1922.28,2497.9 MIC2.7@1922.28,2467.9 1922.28,2437.9 1940.51,2419.67 MIC2.8@1990.19,2419.67 2040.19,2419.67 2058.1,2437.58 MIC2.5@2058.1,2467.9 2058.1,2497.9 2039.87,2516.13 MIC2.6@1990.19,2516.13
  Top Layer w16.81: v1(2545.19,2412.9) 2615.19,2412.9 C29.1@2615.19,2409.36
  Mid-Layer 1 w19.68: 2591.07,2623.58 2666.07,2623.58
  Bottom Layer w19.68: 2591.07,2623.58 2666.07,2623.58
  other v1: 2516.07,1603.58 2576.07,1648.58 1945.19,1657.9 2146.07,1668.58 1895.19,1692.9 2516.07,1713.58 1945.19,1717.9 2146.07,1723.58 1895.19,1752.9 2326.07,1773.58 1945.19,1782.9 2456.07,1783.58 2146.07,1788.58 2311.07,1808.58 1895.19,1812.9 2180.19,1817.9 2275.19,1822.9 2307.58,1942.58 2370.15,1942.65 2339.41,1965.43 2368.87,1992.11 2307.69,1994.9 2279.41,2021.36 2395.15,2021.17 2306.19,2049.4 2369.14,2048.95 2339.03,2075.43 1815.19,2077.9 2605.19,2082.9 2705.19,2082.9 2831.07,2083.58 2881.07,2083.58 2306.63,2097.47 2368.11,2097.28 1770.19,2102.9 1845.19,2112.9 2916.07,2113.58 1720.19,2127.9 1805.19,2142.9 2881.07,2143.58 1870.19,2152.9 2705.19,2212.9 2820.19,2217.9 2875.19,2217.9 2076.07,2233.58 2571.07,2243.58 2845.19,2247.9 2905.19,2247.9 2820.19,2277.9 2875.19,2277.9 2845.19,2307.9 2900.19,2307.9 2036.07,2308.58 2475.19,2312.9 2777.04,2324.38 2715.38,2325.49 2820.19,2337.9 2875.19,2337.9 2746.14,2351.17 2715.4,2376.4 2385.19,2377.9 2777.04,2377.53 2061.07,2378.58 2960.19,2397.9 2570.47,2412.9 2860.19,2417.9 3000.19,2427.9 2175.19,2457.9 2250.19,2457.9 1590.19,2507.9 2355.33,2525.01 1560.19,2532.9 2755.19,2557.9 2056.07,2558.58 2126.07,2558.58 1590.19,2562.9 2191.07,2563.58 1560.19,2587.9 2156.07,2598.58 1856.07,2608.58 1590.19,2612.9 1560.19,2632.9 2125.19,2642.9 1896.07,2643.58 2915.19,2647.9 2950.19,2647.9 2600.19,2652.9 1590.19,2657.9 2895.19,2672.9 2935.19,2672.9 1856.07,2673.58 2915.19,2697.9 2950.19,2697.9 1896.07,2708.58 2895.19,2722.9 2935.19,2722.9 2341.49,2779.01 2405.75,2779.75 1941.07,2813.58 2405.56,2831.05 2343.71,2832.34 2850.19,2832.9 2940.19,2917.9 2980.19,2962.9 2005.19,2967.9 2045.19,2967.9 2255.19,2967.9 2310.19,2967.9 1985.19,2982.9 2025.19,2982.9 2065.19,2982.9 2005.19,2997.9 2045.19,2997.9 2920.19,3012.9 2370.19,3028.17 2740.19,3047.9 2795.19,3047.9 2850.19,3047.9 2715.19,3072.9 2825.19,3072.9 2695.19,3097.9 2335.19,3102.9 2395.19,3102.9 2670.19,3122.9 2720.19,3122.9 2365.19,3137.9 2695.19,3147.9 2335.19,3172.9 2395.19,3172.9
  other v3: 2510.19,1972.9 2345.19,2017.9
  other v4: 3106.14,2681.17
I2CM_CLK: pad.1@2275.19,2537.9 U9.AD8 U12.B3 U15.13 U17.2 | length 1121.2
  Top Layer w5: U17.2@2131.07,2081.54 2131.07,2072.04 v3(2135.24,2067.87) U9.AD8@2217.24,2067.87 ; v2(2206.07,2528.58) 2265.87,2528.58 pad.1@2275.19,2537.9 v2(2310.19,2572.9)
  Mid-Layer 1 w5: v3@1966.04,2398.57 1990.34,2422.87 2065.24,2422.87 2165.94,2523.57 2185.24,2523.57 2206.04,2523.57 v2@2206.04,2528.57 ; v3@2062.24,2112.27 v3(2062.28,2112.3) 2085.24,2117.87 v3(2135.24,2067.87)
  Mid-Layer 2 w5: v3(1966.07,2398.58) 1966.07,2208.51 v3(2062.28,2112.3) ; v2(2310.19,2572.9) 2380.19,2642.9 v3(2380.19,2727.9)
I2CM_SDA: pad.1@2220.19,2492.9 U9.AD10 U12.C3 U15.12 U16.1 | length 1070.7
  Top Layer w5: v3(2135.19,2052.9) 2211.77,2052.9 U9.AD10@2217.24,2047.43 ; v3(2135.19,2052.9) U16.1@2136.04,2040.57
  Mid-Layer 1 w5: v5(1981.07,2383.58) 2005.39,2407.9 2070.19,2407.9 2170.16,2507.87 v2(2220.24,2507.87) ; v3(2073.41,2101.17) 2121.68,2052.9 v3(2135.19,2052.9)
  Mid-Layer 2 w5: v5(1981.07,2383.58) 1980.19,2382.7 1980.19,2212.9 2075.19,2117.9 2075.19,2102.95 v3(2073.41,2101.17) ; v2(2220.24,2507.87) 2363.24,2650.97 v3@2363.24,2727.47
  other v3: 2363.27,2727.43
I2S_CLK: MIC2.3 U9.AD22 | length 784.1
  Mid-Layer 2 w5: v1(1963.61,2451.17) 1958.44,2451.17 1900.24,2392.87 1900.24,2072.87 1995.14,1977.87 2119.24,1977.87 2167.84,1929.27 v2(2217.24,1929.32)
I2S_DATA: MIC2.4 U9.AC11 | length 820.4
  Mid-Layer 2 w5: v1@2016.74,2451.17 1993.64,2451.17 1910.24,2367.77 1910.24,2077.87 2000.24,1987.87 2195.34,1987.87 2219.58,2009.17 2225.35,2028.22 v2(2236.92,2037.58)
  other v1: 2016.77,2451.17
IMU_CLK: U6.13 U9.M2 U10.1 | length 222.9
  Top Layer w5: v3(2345.19,2252.9) 2345.24,2292.87 U10.1@2352.23,2292.9 ; U10.1@2352.23,2292.9 2366.15,2306.82 U6.13@2366.15,2336.31
  Mid-Layer 1 w5: v2(2345.19,2126.17) v3(2345.19,2252.9)
IMU_PWR: C47.1 pad.1@2375.19,2557.9 U5.1 U6.5 U6.8 U6.12 U9.P2 U10.2 | length 981.4
  Top Layer w5: v3(2325.19,2252.9) 2325.19,2285.86 2318.15,2292.9 2346.46,2321.21 U6.12@2346.46,2336.31 ; 2330.24,2402.87 2346.44,2386.67 U6.12@2346.44,2336.27 ; pad.1@2375.19,2557.9 2395.14,2537.95 v1@2395.14,2488.17 ; U6.5@2385.83,2416.03 2396.65,2426.85 C47.1@2396.65,2457.9 2396.65,2486.44 v1(2395.19,2487.9) ; C47.1@2396.65,2457.9 2425.24,2457.87 2445.24,2437.87 2445.24,2305.77 U5.1@2432.23,2292.9
  Mid-Layer 1 w5: v3(2325.19,2252.9) 2330.19,2247.9 2330.19,2132.9 v2(2325.5,2126.17) ; v3(2325.19,2252.9) 2325.24,2417.87 2325.19,2487.9 2340.19,2502.9 2380.19,2502.9 v1(2395.19,2487.9)
IMU_SDA: U5.2 U6.14 U9.H2 | length 236.9
  Top Layer w5: v3(2365.19,2252.9) 2365.19,2259.94 2398.15,2292.9 2385.83,2305.22 U6.14@2385.83,2336.31
  Mid-Layer 1 w5: v3(2365.19,2252.9) 2365.19,2167.9 2384.56,2148.53 v2(2384.56,2126.17)
L5_2: ANT1.1 C33.1 L5.2 | length 182.1
  Top Layer w5: L5.2@2375.19,1761.44 C33.1@2420.19,1761.44 ; 2397.93,1761.44 2400.18,1759.19 ANT1.1@2400.18,1625.32
MIC_PWR: C46.1 MIC2.1 pad.1@2095.19,2527.9 U9.AD16 | length 715
  Top Layer w5: v1(2095.19,2484.36) pad.1@2095.19,2527.9
  Mid-Layer 2 w5: v1@2016.74,2484.67 v1(2095.19,2484.36) 2095.24,2267.87 2260.24,2102.87 2260.24,2012.87 2235.64,1988.37 v2(2217.24,1988.37)
  other v1: 2016.77,2484.63
OUT_CC1: C10.2 U1.12 U12.C1 | length 146.8
  Top Layer w5: U1.12@1949.03,1996.8 1966.34,2014.07 v1(1985.19,2057.9)
  Mid-Layer 1 w5: v1(1985.19,2057.9) 2030.19,2057.9 v3(2051.14,2078.9)
OUT_CC2: C6.1 U1.11 U12.A1 | length 158.7
  Top Layer w5: U1.11@1960.17,1985.66 1980.86,2006.34 C6.1@2005.97,2006.35 2015.19,2015.56 v1(2015.19,2027.9)
  Mid-Layer 2 w5: v1(2015.19,2027.9) 2015.19,2087.49 v3(2028.87,2101.17)
P1.10: pad.@2650.19,1737.9 U9.A20 | length 284.4
  Mid-Layer 1 w5: v2(2473.14,1949) 2473.14,1914.95 pad.@2650.19,1737.9
P1.11: pad.@2655.19,1627.9 U9.B19 | length 414.6
  Mid-Layer 1 w5: v2@2453.44,1958.87 2453.44,1849.67 2655.24,1647.87 pad.@2655.19,1627.9
  other v2: 2453.46,1958.84
P1.12: pad.@2766.07,1683.58 U9.B17 | length 442.8
  Mid-Layer 1 w5: v2@2453.44,1978.57 2456.14,1978.57 2466.74,1967.87 2482.54,1967.87 2741.07,1733.58 2766.04,1708.57 pad.@2766.04,1683.57
  other v2: 2453.46,1978.53
P1.13: pad.@2765.19,1802.9 U9.A16 | length 364.5
  Mid-Layer 1 w5: v2(2473.14,1987.87) 2565.24,1987.87 pad.@2765.19,1802.9
P1.14: pad.@2895.19,1767.9 U9.B15 | length 543.8
  Mid-Layer 1 w5: v2@2453.44,1998.17 2453.44,2002.87 2650.14,2002.87 2885.24,1767.87 pad.@2895.19,1767.9
  other v2: 2453.46,1998.21
PGATE: pad.1@2831.67,2455.38 U8.4 U11.6 | length 103.2
  Top Layer w5: U11.6@2785.51,2434.24 2785.51,2436.1 U8.4@2857.2,2507.78
R1_1: R1.1 U12.B1 | length 40.5
  Top Layer w5: R1.1@2019.09,2058.22 2019.09,2069.17 U12.B1@2039.98,2090.06
R10_2: R10.2 U12.A2 | length 45.8
  Top Layer w5: R10.2@2003.19,2134.12 2018.19,2134.12 U12.A2@2039.98,2112.34
R12_2: C37.1 R12.2 | length 56.8
  Top Layer w15.75: R12.2@2540.19,2529.94 2556.69,2546.44 C37.1@2590.19,2546.44
R20_2: C20.1 R20.2 | length 65.6
  Top Layer w5: C20.1@2472.6,2546.17 2472.6,2547.87 2475.19,2550.46 2491.14,2566.41 R20.2@2491.14,2604.13
RAC1_2: C23.1 Q6.5 Q6.6 Q6.7 Q6.8 R2.2 R8.1 RAC1.2 | length 384.5
  Top Layer w5: RAC1.2@1867.31,2977.34 1867.31,2930 R2.2@1899.09,2898.22 ; 1925.24,2977.87 1936.74,2977.87 2031.74,2882.87 R8.1@2178.14,2882.87
RESET: C28.1 pad.1@2016.07,1758.58 U4.1 U9.AC13 | length 453.4
  Top Layer w5: pad.1@2016.07,1758.58 2030.29,1744.36 C28.1@2075.19,1744.36 v1(2075.19,1832.9)
  Mid-Layer 1 w5: v1(2075.19,1832.9) 2145.24,1832.87 2245.24,1932.87 2245.14,2009.67 v2(2236.92,2017.9)
RSR_1: C7.2 R4.2 RSR.1 | length 110.3
  Top Layer w5: R4.2@2833.19,2908.22 2839.09,2908.22 C7.2@2870.97,2876.35 2873.63,2876.34 2900.19,2902.9 2900.19,2907.9 2890.19,2917.9
S$1142: 
S$32985: 
S$46553: 
S$46557: 
S$46640: 
S$46644: 
S$46690: 
S$46694: 
S$46698: 
S$46720: 
S$46732: 
S$46736: 
S$46740: 
S$46744: 
STRIP+: C30.2 L1.2 pad.@3170.19,2387.9 R3.1 | length 147.2
  Top Layer w5: R3.1@2991.04,2350.67 2991.04,2393.57 3006.04,2408.57 3066.14,2408.57 C30.2@3066.14,2385.57
STRIP_BRGHT: pad.1@2680.82,2128.53 U9.A8 U11.3 | length 399.7
  Top Layer w5: U9.A8@2473.14,2067.11 2619.4,2067.11 pad.1@2680.82,2128.53 2746.14,2193.85 U11.3@2746.14,2268.1
SWDCLK: pad.1@2266.07,1778.58 pad.1@2300.19,1652.9 U9.AA24 | length 264.6
  Top Layer w5: U9.AA24@2256.61,1889.95 2256.54,1879.07 2245.24,1867.97 2245.24,1729.37 2300.24,1674.37 pad.1@2300.19,1652.9
SWDIO: pad.1@2196.07,1778.58 pad.1@2215.19,1652.9 U9.AC24 | length 246.1
  Top Layer w5: pad.1@2215.19,1652.9 2215.24,1868.27 U9.AC24@2236.92,1889.95
U1_3: C11.2 U1.3 | length 62.4
  Top Layer w5: C11.2@1806.31,1916 1819.41,1902.9 1830.19,1902.9 1851.7,1924.41 U1.3@1854.38,1924.42
U9_B3: L2.2 U9.B3 | length 102.9
  Top Layer w5: 2460.19,2117.9 2529.96,2187.67 L2.2@2534.24,2187.67
U9_C1: C52.1 U9.C1 | length 46.3
  Top Layer w5: C52.1@2424.24,2188.17 2424.24,2155.38 U9.C1@2433.77,2145.85
U9_D23: C54.2 U9.D23 | length 77.8
  Top Layer w5: U9.D23@2423.93,1909.63 2423.93,1899.16 2468.46,1854.63 C54.2@2472.78,1854.63
U9_N24: C5.2 U9.N24 | length 48.5
  Top Layer w5: C5.2@2315.7,1849.63 2335.35,1869.28 U9.N24@2335.35,1889.95
U9_W24: U9.W24